# Altium PCB 电机小板的电路图.PcbDoc
Units mm, origin at the board's own origin, x right, y up, seen from the top; angles counter-clockwise.
Board outline 19 x 26.8 mm, 4 copper layers (Top Layer, Mid-Layer 7, Mid-Layer 14, Bottom Layer); 9 components, 7 nets, 40 pads, 13 vias.
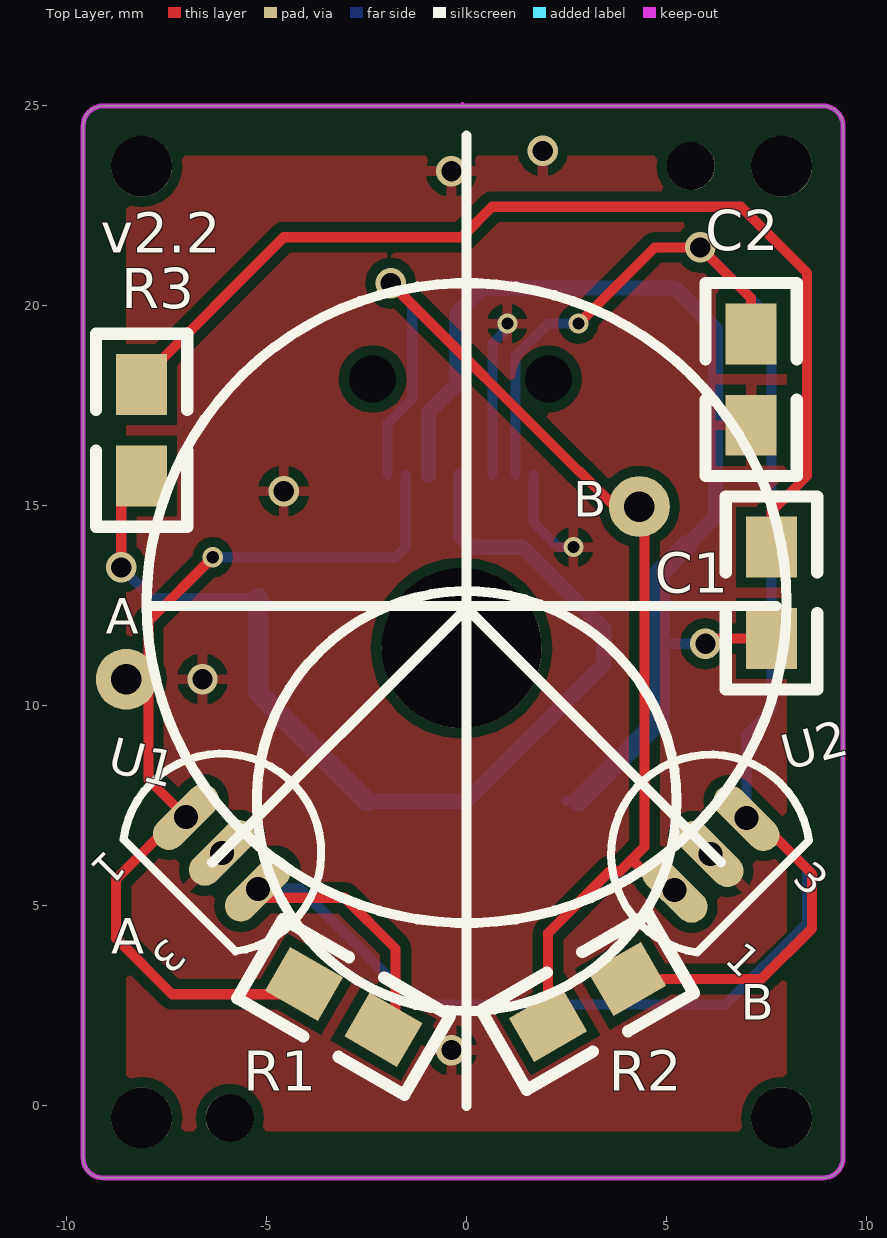
[diagram p0: Top Layer view]
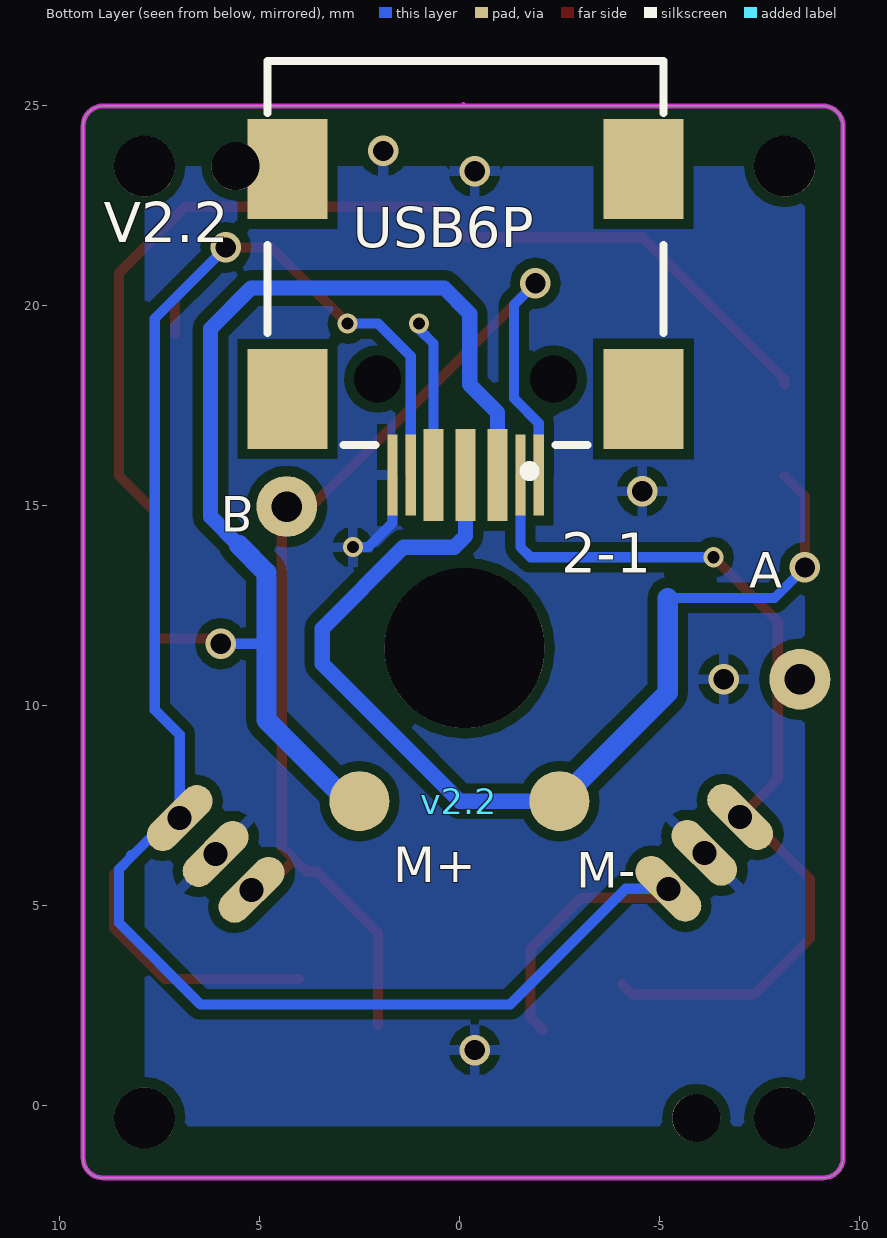
[diagram p1: Bottom Layer view, seen from below]

## Layer stack, top to bottom
Top Layer: signal copper 0.0356
Dielectric: dielectric 0.32, FR-4, Dk 4.8
Mid-Layer 7: signal copper 0.0356
Dielectric: dielectric 0.32, FR-4, Dk 4.8
Mid-Layer 14: signal copper 0.0356
Dielectric: dielectric 0.32, FR-4, Dk 4.8
Bottom Layer: signal copper 0.0356

## Board outline
-9.59,-1.3 ccw(c-9.09,-1.3) -9.09,-1.8 8.91,-1.8 ccw(c8.91,-1.3) 9.41,-1.3 9.41,24.5 ccw(c8.91,24.5) 8.91,25 -9.09,25 ccw(c-9.09,24.5) -9.59,24.5

## Design rules (kind name [scope] priority, off if disabled: settings)
Clearance [All] p1: gap=0.254
PolygonConnect [All] p1: connectstyle=Relief reliefconductorwidth=0.254 reliefentries=4 polygonreliefangle="90 Angle"
RoutingVias [All] p1: holewidth=0.711 width=1.27 viastyle="Through Hole" minholewidth=0.711 minwidth=1.27 maxholewidth=0.711 maxwidth=1.27
SilkscreenOverComponentPads [All] p1: minsilkscreentomaskgap=0.254
SolderMaskExpansion [All] p1: expansion=0.102
TestPointUsage [All] p1: valid=0 allowmultiple=FALSE
Testpoint [All] p1: side=15 testpointundercomponent=TRUE minsize=1.016 maxsize=2.54 preferedsize=1.524 minholesize=0 maxholesize=1.016 preferedholesize=0.813 testpointgrid=0.025 style=1023 order=0-112345678
Width [All] p1: maxlimit=0.254 minlimit=0.254 preferedwidth=0.254
23 further rules are at their usual default settings.

## Components (designator, comment, footprint, x,y, rotation, side; value= is the part's Value field where it differs from the comment)
C1 "Cap" 0805 7.62,11.684 r90 top
C2 "Cap" 0805 7.112,19.304 r270 top
R1 "res2" 0805 -4.064,3.048 r330 top
R2 "res2" 0805 2.032,2.032 r30 top
R3 "res2" 0805 -8.128,15.748 r90 top
U1 "Comment" TO-92A -6.119,6.327 r225 top locked
U2 "Comment" TO-92A 6.096,6.3 r315 top
USB6P "Comment" USB6P -1.727,17.55 r90 bottom
v2.2 "Motor" RB5-10.5 0,7.62 r0 top (schematic designator motor1)

## Footprints (in the part's own frame and the unit in brackets; to place one, negate y for a bottom-side part, rotate by r counter-clockwise, add the part's x,y. Pads: shape width x height; smd on the part's side, far side on the other; paste and mask are expansions set on the pad)
0805 [mil]
  rect 60x50 smd: 1(0,-0.06) 2(90,-0.06)
  silkscreen extent -50,-45 140,45
RB5-10.5 [mm] "Motor, General Kind; 2 Leads"
  round 1.5 smd far side: 1(-2.5,0) 2(2.5,0)
  silkscreen extent -5.25,-5.25 5.25,5.25
TO-92A [mm] "TO, Flat Index; 3 In-Line, Axial Leads; Body Dia. 4.5mm; Leads 0.51 x 0.48 mm (max)"
  oval 2x0.8 hole 0.6: 1(0,-1.27) 2(0,0) 3(0,1.27)
  silkscreen extent -2.48,-2.48 1.5,2.48
USB6P [mm]
  rect 2.032x0.254 smd: 1(-1.778,-0.254) 2(-1.778,0.203) 5(-1.778,3.402) 6(-1.778,2.946)
  rect 2.3x0.5 smd: 3(-1.778,0.775) 4(-1.778,1.575) 5(-1.778,2.375)
  rect 2.5x2 smd: 7(0.122,-2.875) 7(0.122,6.025) 7(5.876,-2.875) 7(5.876,6.025)
  round 0.9 hole 1.17 unplated: MH1(0.622,3.774) MH2(0.622,-0.625)
  silkscreen extent -1.8,-3.38 8.57,6.52

## Part data
C1 C2: "Capacitor"
R1 R2 R3: "Resistor"
v2.2: "Motor, General Kind"

## Free pads (board coordinates)
  round 4 hole 4: 0(-0.127,11.446)
  round 1.524 hole 0.762: 1(4.318,14.986) 2(-8.509,10.668)
  round 1.524 hole 1.524: 6(-8.128,23.495) 7(7.874,23.495) 8(-8.128,-0.3) 9(7.874,-0.3)
  round 1.2 hole 1.2: 6(-5.92,-0.3) 6(5.6,23.495)

## Via types
v1: diameter 0.762, hole 0.508, Top Layer to Bottom Layer, 9 vias
v2: diameter 0.5, hole 0.3, Top Layer to Bottom Layer, 3 vias
v3: diameter 0.508, hole 0.305, Top Layer to Bottom Layer, 1 vias

## Nets (pads, with @x,y where several pads share a name; then routed paths per layer and width w, separated by ;. In a path a pad name is that pad's centre, name@x,y a point inside that pad or via, vN(x,y) a via of type N, cw(c..) or ccw(c..) an arc to the next point about the centre after c; other vN are vias at no path point)
A: pad.2 R1.1 U1.1 USB6P.2 | length 23.5
  Top Layer w0.254: v3(-6.35,13.716) -7.955,12.111 -7.955,10.668 -7.955,8.163 U1.1 -7.21,7.225 -8.763,5.672 -8.763,4.191 -7.366,2.794 -4.317,2.794 R1.1
  Bottom Layer w0.254: v3(-6.35,13.716) -1.778,13.716 -1.524,13.97 USB6P.2
B: pad.1 R2.1 U2.1 USB6P.1 | length 29.4
  Top Layer w0.254: v1(-1.9,20.571) 2.822,15.849 2.839,15.849 3.702,14.986 pad.1 4.445,14.859 4.445,6.477 4.127,6.159 ; R2.1 2.033,4.319 3.58,5.866 3.834,5.866 4.127,6.159 ; U2.1 4.885,5.402 4.127,6.159
  Bottom Layer w0.254: USB6P.1 -1.981,17.069 -1.361,17.689 -1.361,20.032 v1(-1.9,20.571)
GND: C2.2 U1.2 U2.2 USB6P.5 | length 6.4
  Bottom Layer w0.254: USB6P.5@0.648,15.772 0.648,19.063 1.016,19.431 v2(1.016,19.558) ; USB6P.5@1.675,15.772 1.675,14.581 2.286,13.97 v2(2.667,13.97)
  other v1: -0.381,1.397 -6.604,10.668 -4.572,15.367 -0.381,23.368 1.905,23.876
M+: C1.1 USB6P.3 v2.2.2 | length 27.8
  Top Layer w0.254: v1@5.969,11.684 C1.1
  Bottom Layer w0.254: v2.2.2 v2.2.2@2.794,7.62 ; 4.826,11.557 v1(5.969,11.557) ; 4.826,13.208 4.826,13.335
  Bottom Layer w0.381: USB6P.3 -0.952,17.336 -0.254,18.034 -0.254,19.812 0.381,20.447 2.413,20.447 5.207,20.447 6.223,19.431 6.223,14.732 5.507,14.016
  Bottom Layer w0.508: v2.2.2@2.794,7.62 4.826,9.652 4.826,11.557 4.826,13.208 ; 4.826,13.335 5.507,14.016
M-: R3.1 USB6P.4 v2.2.1 | length 26.7
  Top Layer w0.254: v1(-8.636,13.462) -8.636,15.238 R3.1
  Bottom Layer w0.254: v1(-8.636,13.462) -7.874,12.7 -5.207,12.7
  Bottom Layer w0.381: v2.2.1 0,7.62 3.429,11.049 3.429,11.684 3.429,11.938 1.397,13.97 0.127,13.97 -0.152,14.249 USB6P.4
  Bottom Layer w0.508: -5.207,12.7 -5.207,10.327 v2.2.1
NetC1_2: C1.2 R3.2 | length 26.5
  Top Layer w0.254: R3.2 -8.126,18.163 -4.572,21.717 -0.127,21.717 0.635,22.479 6.858,22.479 8.509,20.828 8.509,15.748 7.622,14.861 C1.2
VCC: C2.1 R1.2 R2.2 U1.3 U2.3 USB6P.6 | length 62.8
  Top Layer w0.254: U1.3@-5.715,4.953 -5.461,5.207 -3.048,5.207 -1.778,3.937 -1.778,2.211 R1.2 ; v2(2.794,19.558) 4.699,21.463 v1(5.842,21.463) 7.11,20.195 C2.1 ; R2.2@4.446,3.174 R2.2 7.365,3.174 8.636,4.445 8.636,5.799 8.487,5.947 ; U2.3 7.237,7.198 8.487,5.947 ; 8.212,6.223 8.487,5.947
  Bottom Layer w0.254: U1.3 -4.159,5.429 -1.27,2.54 6.477,2.54 8.509,4.572 8.509,5.926 8.212,6.223 ; USB6P.6 1.219,18.745 2.032,19.558 v2(2.794,19.558) ; v1(5.842,21.463) 7.62,19.685 7.62,17.399 ; 7.62,18.161 7.62,17.399 ; 8.212,6.266 8.212,6.223 ; 7.62,17.399 7.62,9.906 6.994,9.28 6.994,7.441 8.212,6.223
pads on no net: USB6P.7 USB6P.MH1 USB6P.MH2

## Polygon pours and split planes (outlines as drawn)
GND on Top Layer "Top Layer-No Net" (solid): -7.874,24.003 -7.62,23.749 8.001,23.749 8.001,-0.173 7.874,-0.3 7.539,-0.635 -8.001,-0.635 -8.509,-0.127 -8.509,23.495 -8.382,23.495 -7.874,24.003
GND on Bottom Layer "Top Layer-No Net" (solid): -7.747,23.749 -7.493,23.495 7.874,23.495 7.874,0 7.747,-0.127 7.366,-0.508 -7.62,-0.508 -7.747,-0.508 -8.255,0 -8.636,0.381 -8.636,22.352 -8.636,23.114 -8.001,23.749

## Keep-outs
Keep-Out Layer:
  lines w0.127: -0.105,25 -0.105,25.035 ; -9.59,-1.3 ccw(c-9.09,-1.3) -9.09,-1.8 8.91,-1.8 ccw(c8.91,-1.3) 9.41,-1.3 9.41,24.5 ccw(c8.91,24.5) 8.91,25 -9.09,25 ccw(c-9.09,24.5) -9.59,24.5 -9.59,-1.3

## Silkscreen, mask and mechanical layers (free items; w line width, h text height)
Top Overlay:
  circle w0.254: c0,12.573 r8
  lines w0.254: -7.874,12.5 7.747,12.5 ; -6.36,6.086 0,12.446 6.36,6.086 ; 0,0 0,24.257
  text "B" at 2.667,14.732 h0.89
  text "A" at -9.017,11.811 h0.89
  text "A" at -8.89,3.81 h0.89
  text "B" at 6.858,2.159 h0.89
Bottom Overlay:
  text "V2.2" at 8.89,21.59 h1
  text "B" at 5.969,15.24 h0.89 r180
  text "2-1" at -2.54,13.335 h1
  text "A" at -7.239,12.954 h0.89
  text "M+" at 1.651,5.588 h0.89
  text "M-" at -2.921,5.461 h0.89

## Text inside footprints (layer, text, board x,y; h text height)
U1: Top Overlay "1" at -8.982,6.436 h0.76 r225; Top Overlay "3" at -7.477,4.248 h0.76 r225
U2: Top Overlay "1" at 6.418,3.625 h0.76 r315; Top Overlay "3" at 8.109,5.656 h0.76 r315